# Altium PCB High_Power_Board_v2.PcbDoc (part 3 of 3)
Units mm, origin at the board's own origin, x right, y up, seen from the top; angles counter-clockwise.
Board outline 370 x 200 mm, 2 copper layers (Top Layer, Bottom Layer); 309 components, 248 nets, 1084 pads, 8 vias.
Unrouted connection lines stored in the file: 720.
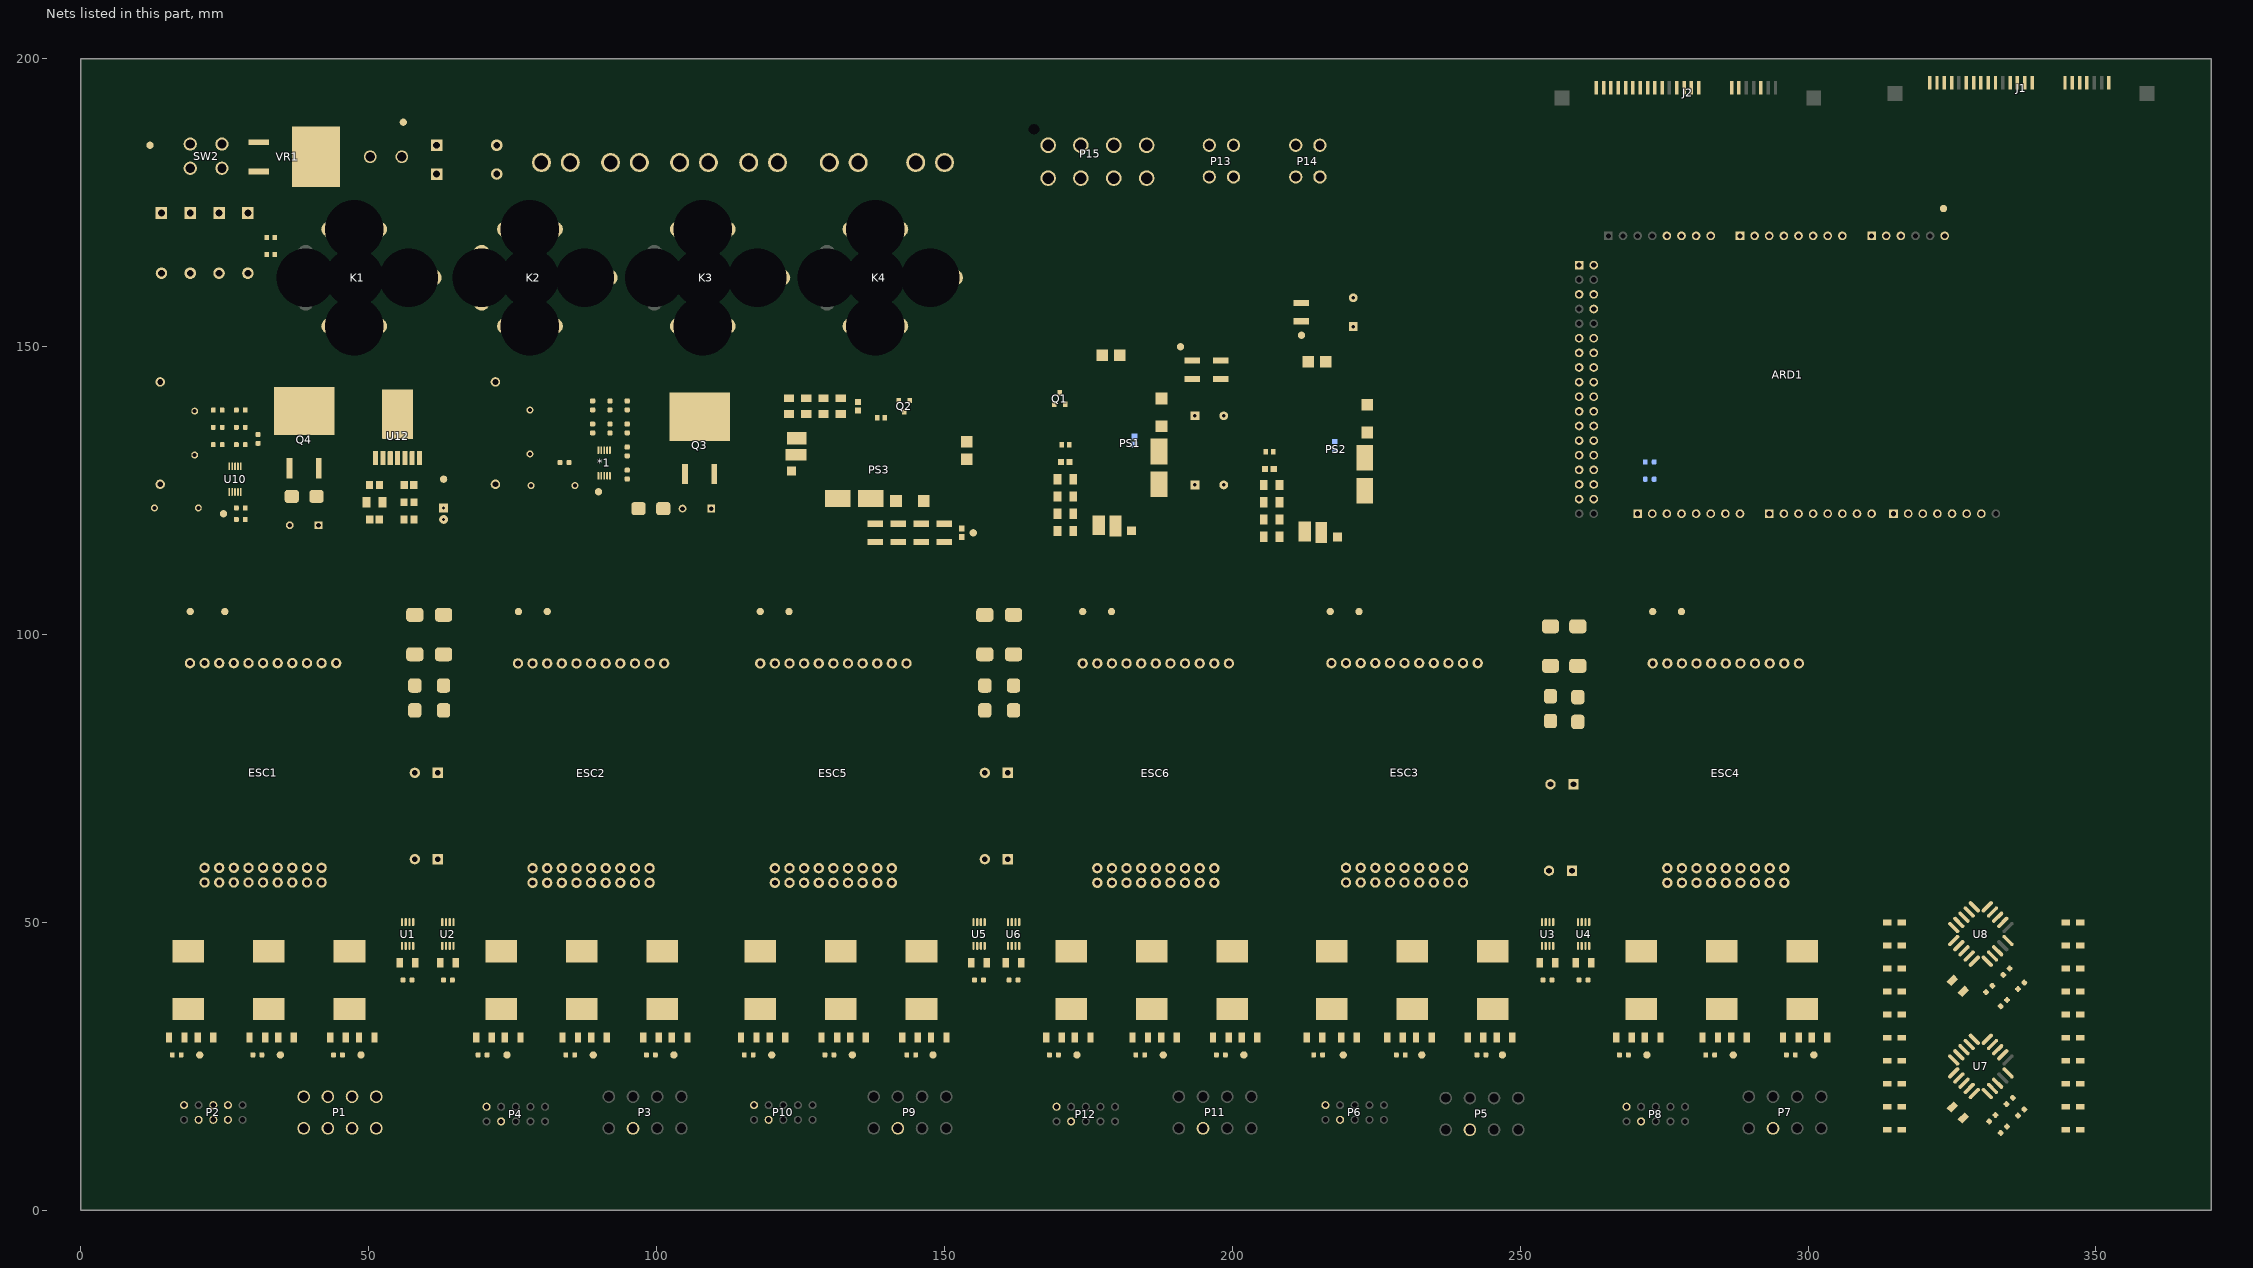
[diagram p2: the nets of this part, all layers, seen from the top]

## Via types
v1: diameter 3, hole 3, Top Layer to Bottom Layer, 4 vias
v2: diameter 1.4, hole 1.4, Top Layer to Bottom Layer, 4 vias

## Nets (pads, with @x,y where several pads share a name; then routed paths per layer and width w, separated by ;. In a path a pad name is that pad's centre, name@x,y a point inside that pad or via, vN(x,y) a via of type N, cw(c..) or ccw(c..) an arc to the next point about the centre after c; other vN are vias at no path point) (continued)
Net*1_3: *1.3 R46.1 R49.2
Net*1_4: *1.4 R47.1 R50.2
Net*1_6: *1.6 C84.2
Net*1_7: *1.7 Rpwr1.2
Net*1_8: *1.8 R48.2 TP38.1
Net*1_10: *1.10 Q3.1
NetARD1_0: ARD1.0 ESC2.27 TP9.1
NetARD1_1: ARD1.1 ESC1.27 TP4.1
NetARD1_2: ARD1.2 U6.2
NetARD1_3: ARD1.3 U6.1
NetARD1_4: ARD1.4 U5.2
NetARD1_5: ARD1.5 U5.1
NetARD1_6: ARD1.6 U4.2
NetARD1_7: ARD1.7 U4.1
NetARD1_8: ARD1.8 U3.2
NetARD1_9: ARD1.9 U3.1
NetARD1_10: ARD1.10 U2.2
NetARD1_11: ARD1.11 U2.1
NetARD1_12: ARD1.12 U1.2
NetARD1_13: ARD1.13 U1.1
NetARD1_14: ARD1.14 ESC3.27 TP14.1
NetARD1_15: ARD1.15 ESC4.27 TP19.1
NetARD1_16: ARD1.16 ESC5.27 TP24.1
NetARD1_17: ARD1.17 ESC6.27 TP29.1
NetARD1_18: ARD1.18 J1.17
NetARD1_19: ARD1.19 J1.18
NetARD1_20: ARD1.20 ARD1.21 J2.16 J2.17 R1.1 R2.1 U1.3 U1.4 U2.3 U2.4 U3.3 U3.4 U4.3 U4.4 U5.3 U5.4 U6.3 U6.4
NetARD1_22: ARD1.22 ESC1.20
NetARD1_23: ARD1.23 ESC1.19 R3.1
NetARD1_24: ARD1.24 ESC1.22
NetARD1_25: ARD1.25 ESC1.21
NetARD1_26: ARD1.26 ESC2.22
NetARD1_27: ARD1.27 ESC2.21
NetARD1_28: ARD1.28 ESC2.20
NetARD1_29: ARD1.29 ESC2.19 R7.1
NetARD1_30: ARD1.30 ESC3.19 R11.1
NetARD1_31: ARD1.31 ESC3.20
NetARD1_32: ARD1.32 ESC3.21
NetARD1_33: ARD1.33 ESC3.22
NetARD1_34: ARD1.34 ESC4.21
NetARD1_35: ARD1.35 ESC4.22
NetARD1_36: ARD1.36 ESC4.19 R15.1
NetARD1_37: ARD1.37 ESC4.20
NetARD1_38: ARD1.38 ESC5.21
NetARD1_39: ARD1.39 ESC5.22
NetARD1_40: ARD1.40 ESC5.19 R19.1
NetARD1_41: ARD1.41 ESC5.20
NetARD1_42: ARD1.42 ESC6.19 R23.1
NetARD1_43: ARD1.43 ESC6.20
NetARD1_44: ARD1.44 ESC6.21
NetARD1_45: ARD1.45 ESC6.22
NetARD1_48: ARD1.48 Q1.1
NetARD1_50: ARD1.50 Q2.1
NetARD1_51: ARD1.51 U12.3
NetARD1_54: ARD1.54 TP1.1
NetARD1_60: ARD1.60 ESC6.24
NetARD1_61: ARD1.61 ESC6.25
NetARD1_62: ARD1.62 ESC5.24
NetARD1_63: ARD1.63 ESC5.25
NetARD1_64: ARD1.64 ESC4.24
NetARD1_65: ARD1.65 ESC4.25
NetARD1_66: ARD1.66 ESC1.25
NetARD1_67: ARD1.67 ESC1.24
NetARD1_68: ARD1.68 ESC2.25
NetARD1_69: ARD1.69 ESC2.24
NetARD1_70: ARD1.70 ESC3.25
NetARD1_71: ARD1.71 ESC3.24
NetC1_1: C1.1 D1.2 ESC1.7 ESC1.8 F1.2
NetC3_1: C3.1 R4.2
NetC6_1: C6.1 R5.2
NetC8_1: C8.1 R6.2
NetC9_1: C9.1 D2.2 ESC2.7 ESC2.8 F2.2
NetC11_1: C11.1 R8.2
NetC14_1: C14.1 R9.2
NetC16_1: C16.1 R10.2
NetC17_1: C17.1 D3.2 ESC3.7 ESC3.8 F3.2
NetC19_1: C19.1 R12.2
NetC22_1: C22.1 R13.2
NetC24_1: C24.1 R14.2
NetC25_1: C25.1 D4.2 ESC4.7 ESC4.8 F4.2
NetC27_1: C27.1 R16.2
NetC30_1: C30.1 R17.2
NetC32_1: C32.1 R18.2
NetC33_1: C33.1 D5.2 ESC5.7 ESC5.8 F5.2
NetC35_1: C35.1 R20.2
NetC38_1: C38.1 R21.2
NetC40_1: C40.1 R22.2
NetC41_1: C41.1 D6.2 ESC6.7 ESC6.8 F6.2
NetC43_1: C43.1 R24.2
NetC46_1: C46.1 R25.2
NetC48_1: C48.1 R26.2
NetC51_1: C51.1 SW1.2 VR1.1
NetC79_1: C79.1 R41.1 R42.2 U12.6
NetC81_2: C81.2 U12.5
NetC86_2: C86.2 U10.6
NetD7_2: D7.2 D11.2 K1.86 K3.86 SW2.2
NetD8_2: D8.2 D9.2 SW1.1 TP32.1
NetD10_2: D10.2 D12.2 K2.86 K4.86 SW2.4
NetDS1_2: DS1.2 U7.1
NetDS2_2: DS2.2 U8.1
NetDS3_2: DS3.2 U7.20
NetDS4_2: DS4.2 U8.20
NetDS5_2: DS5.2 U7.19
NetDS6_2: DS6.2 U8.19
NetDS7_2: DS7.2 U7.18
NetDS8_2: DS8.2 U8.18
NetDS9_2: DS9.2 U7.17
NetDS10_2: DS10.2 U8.17
NetDS11_2: DS11.2 U7.16
NetDS12_2: DS12.2 U8.16
NetDS13_2: DS13.2 U7.15
NetDS14_2: DS14.2 U8.15
NetDS15_2: DS15.2 U7.14
NetDS16_2: DS16.2 U8.14
NetDS17_2: DS17.2 U7.13
NetDS18_2: DS18.2 U8.13
NetDS19_2: DS19.2 U7.12
NetDS20_2: DS20.2 U8.12
NetESC1_1: ESC1.1 ESC1.2 L1.1
NetESC1_3: ESC1.3 ESC1.4 L2.1
NetESC1_5: ESC1.5 ESC1.6 L3.1
NetESC1_29: ESC1.29 TP3.1 U1.8
NetESC2_1: ESC2.1 ESC2.2 L4.1
NetESC2_3: ESC2.3 ESC2.4 L5.1
NetESC2_5: ESC2.5 ESC2.6 L6.1
NetESC2_29: ESC2.29 TP8.1 U2.8
NetESC3_1: ESC3.1 ESC3.2 L7.1
NetESC3_3: ESC3.3 ESC3.4 L8.1
NetESC3_5: ESC3.5 ESC3.6 L9.1
NetESC3_29: ESC3.29 TP13.1 U3.8
NetESC4_1: ESC4.1 ESC4.2 L10.1
NetESC4_3: ESC4.3 ESC4.4 L11.1
NetESC4_5: ESC4.5 ESC4.6 L12.1
NetESC4_29: ESC4.29 TP18.1 U4.8
NetESC5_1: ESC5.1 ESC5.2 L13.1
NetESC5_3: ESC5.3 ESC5.4 L14.1
NetESC5_5: ESC5.5 ESC5.6 L15.1
NetESC5_29: ESC5.29 TP23.1 U5.8
NetESC6_1: ESC6.1 ESC6.2 L16.1
NetESC6_3: ESC6.3 ESC6.4 L17.1
NetESC6_5: ESC6.5 ESC6.6 L18.1
NetESC6_29: ESC6.29 TP28.1 U6.8
NetK1_30: K1.30 K2.87
NetK3_30: K3.30 K4.30
NetPS1_1: PS1.1 Q1.3 R35.1
NetPS1_7: PS1.7 R36.2
NetPS2_1: PS2.1 R37.1
NetPS2_7: PS2.7 R38.2
NetPS3_1: PS3.1 Q2.3 R39.1
NetPS3_7: PS3.7 R40.2
NetQ4_1: Q4.1 U10.10
NetR27_1: R27.1 R31.2 U7.5
NetR28_1: R28.1 R34.2 U8.5
NetR29_2: R29.2 R30.1 U7.4 U7.10
NetR30_2: R30.2 U7.6 U7.8
NetR32_2: R32.2 R33.1 U8.4 U8.10
NetR33_2: R33.2 U8.6 U8.8
NetR43_2: R43.2 U12.2
NetR44_2: R44.2 Rsns1.2
NetR51_1: R51.1 R52.2 U10.1
NetR51_2: R51.2 Rsns2.2
NetR53_1: R53.1 R56.2 U10.3
NetR54_1: R54.1 R57.2 U10.4
NetR55_2: R55.2 TP39.1 U10.8
NetRpwr2_2: Rpwr2.2 U10.7
NetTH3_1: TH3.1 TH9.1
NetTH4_1: TH4.1 TH10.1
pads on no net: ARD1.46 ARD1.47 ARD1.49 ARD1.52 ARD1.53 ARD1.55 ARD1.56 ARD1.72 ARD1.73 ARD1.74 ARD1.75 ARD1.77 ARD1.80 ARD1.81 J1.5 J1.7@343.1,194.5 J1.11 J1.20 J1.21 J1.23 J1.24 J2.7@285.2,193.675 J2.11 J2.18 J2.19 J2.21 J2.22 J2.23 J2.24 K1.87 K2.87a K3.87 K4.87 P2.1 P2.4 P2.9 P2.10 P3.1 P3.2 P3.3 P3.4 P3.5 P3.7 P3.8 P4.1 P4.4 P4.5 P4.6 P4.7 P4.8 P4.9 P4.10 P5.1 P5.2 P5.3 P5.4 P5.5 P5.7 P5.8 P6.1 P6.4 P6.5 P6.6 P6.7 P6.8 P6.9 P6.10 P7.1 P7.2 P7.3 P7.4 P7.5 P7.7 P7.8 P8.1 P8.4 P8.5 P8.6 P8.7 P8.8 P8.9 P8.10 P9.1 P9.2 P9.3 P9.4 P9.5 P9.7 P9.8 P10.1 P10.4 P10.5 P10.6 P10.7 P10.8 P10.9 P10.10 P11.1 P11.2 P11.3 P11.4 P11.5 P11.7 P11.8 P12.1 P12.4 P12.5 P12.6 P12.7 P12.8 P12.9 P12.10 U7.7 U7.9 U8.7 U8.9
copper on no net:
  other v1: 266.58,121 341.51,121 260.23,169.26 342.78,169.26
  other v2: 260.22,193.175 297.98,193.175 318.12,194 355.88,194

## Silkscreen, mask and mechanical layers (free items; w line width, h text height)
Top Overlay:
  lines w0.254: 77,179 88,179 88,187 77,187 77,179 ; 89,179 100,179 100,187 89,187 89,179 ; 101,179 112,179 112,187 101,187 101,179 ; 113,179 124,179 124,187 113,187 113,179 ; 127,179 138,179 138,187 127,187 127,179 ; 142,179 153,179 153,187 142,187 142,179
  text "37V - 3" at 77.254,187.254 h1.52
  text "37V - 1" at 89.254,187.254 h1.52
  text "37V - 2" at 101.254,187.254 h1.52
  text "37V - 4" at 113.254,187.254 h1.52
  text "18.5V - 2" at 127.254,187.254 h1.52
  text "18.5V - 1" at 142.254,187.254 h1.52